# Altium PCB stm32f103_m95.PcbDoc (part 1 of 2)
Units mm, origin at the board's own origin, x right, y up, seen from the top; angles counter-clockwise.
Board outline 80 x 106 mm, 2 copper layers (Top Layer, Bottom Layer); 128 components, 90 nets, 432 pads, 87 vias.
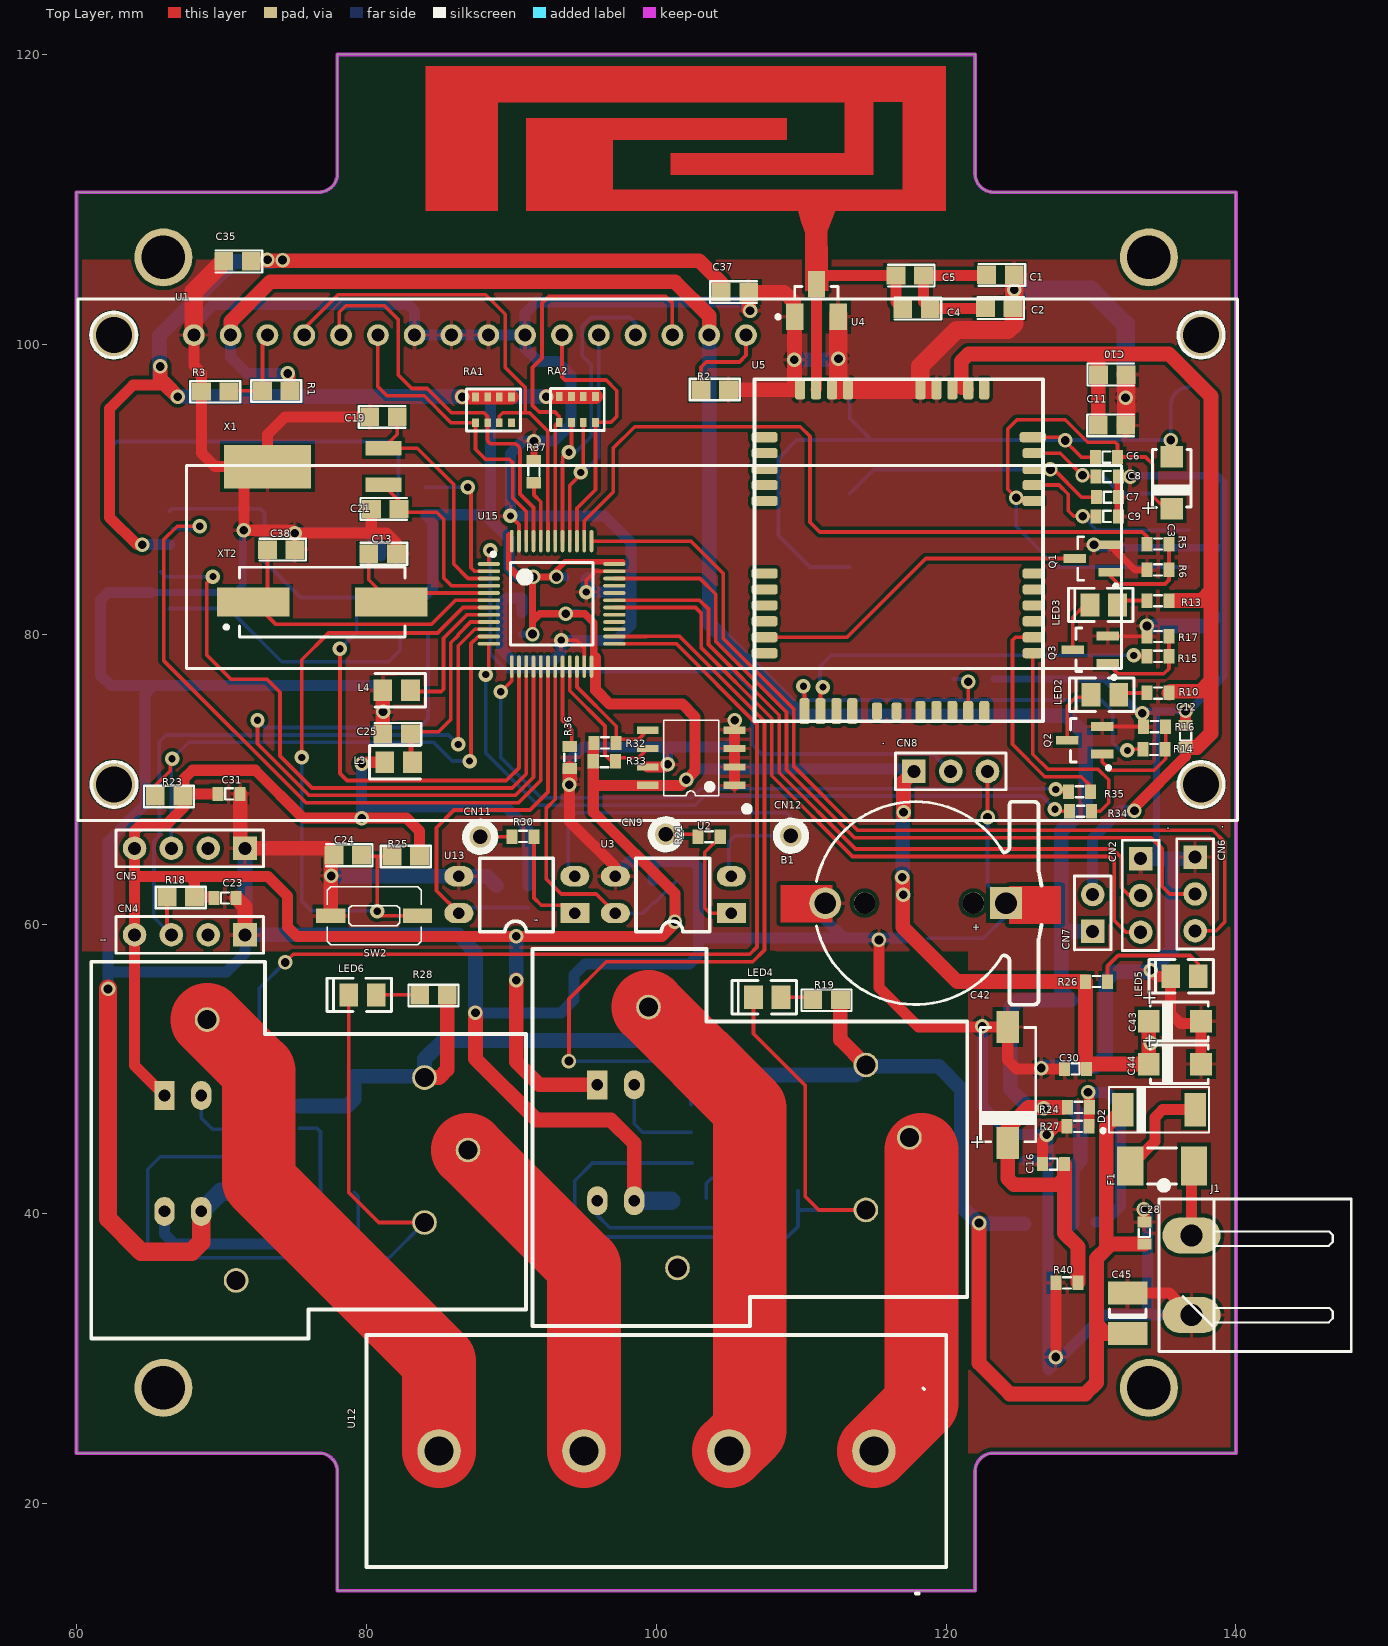
[diagram p0: Top Layer view]
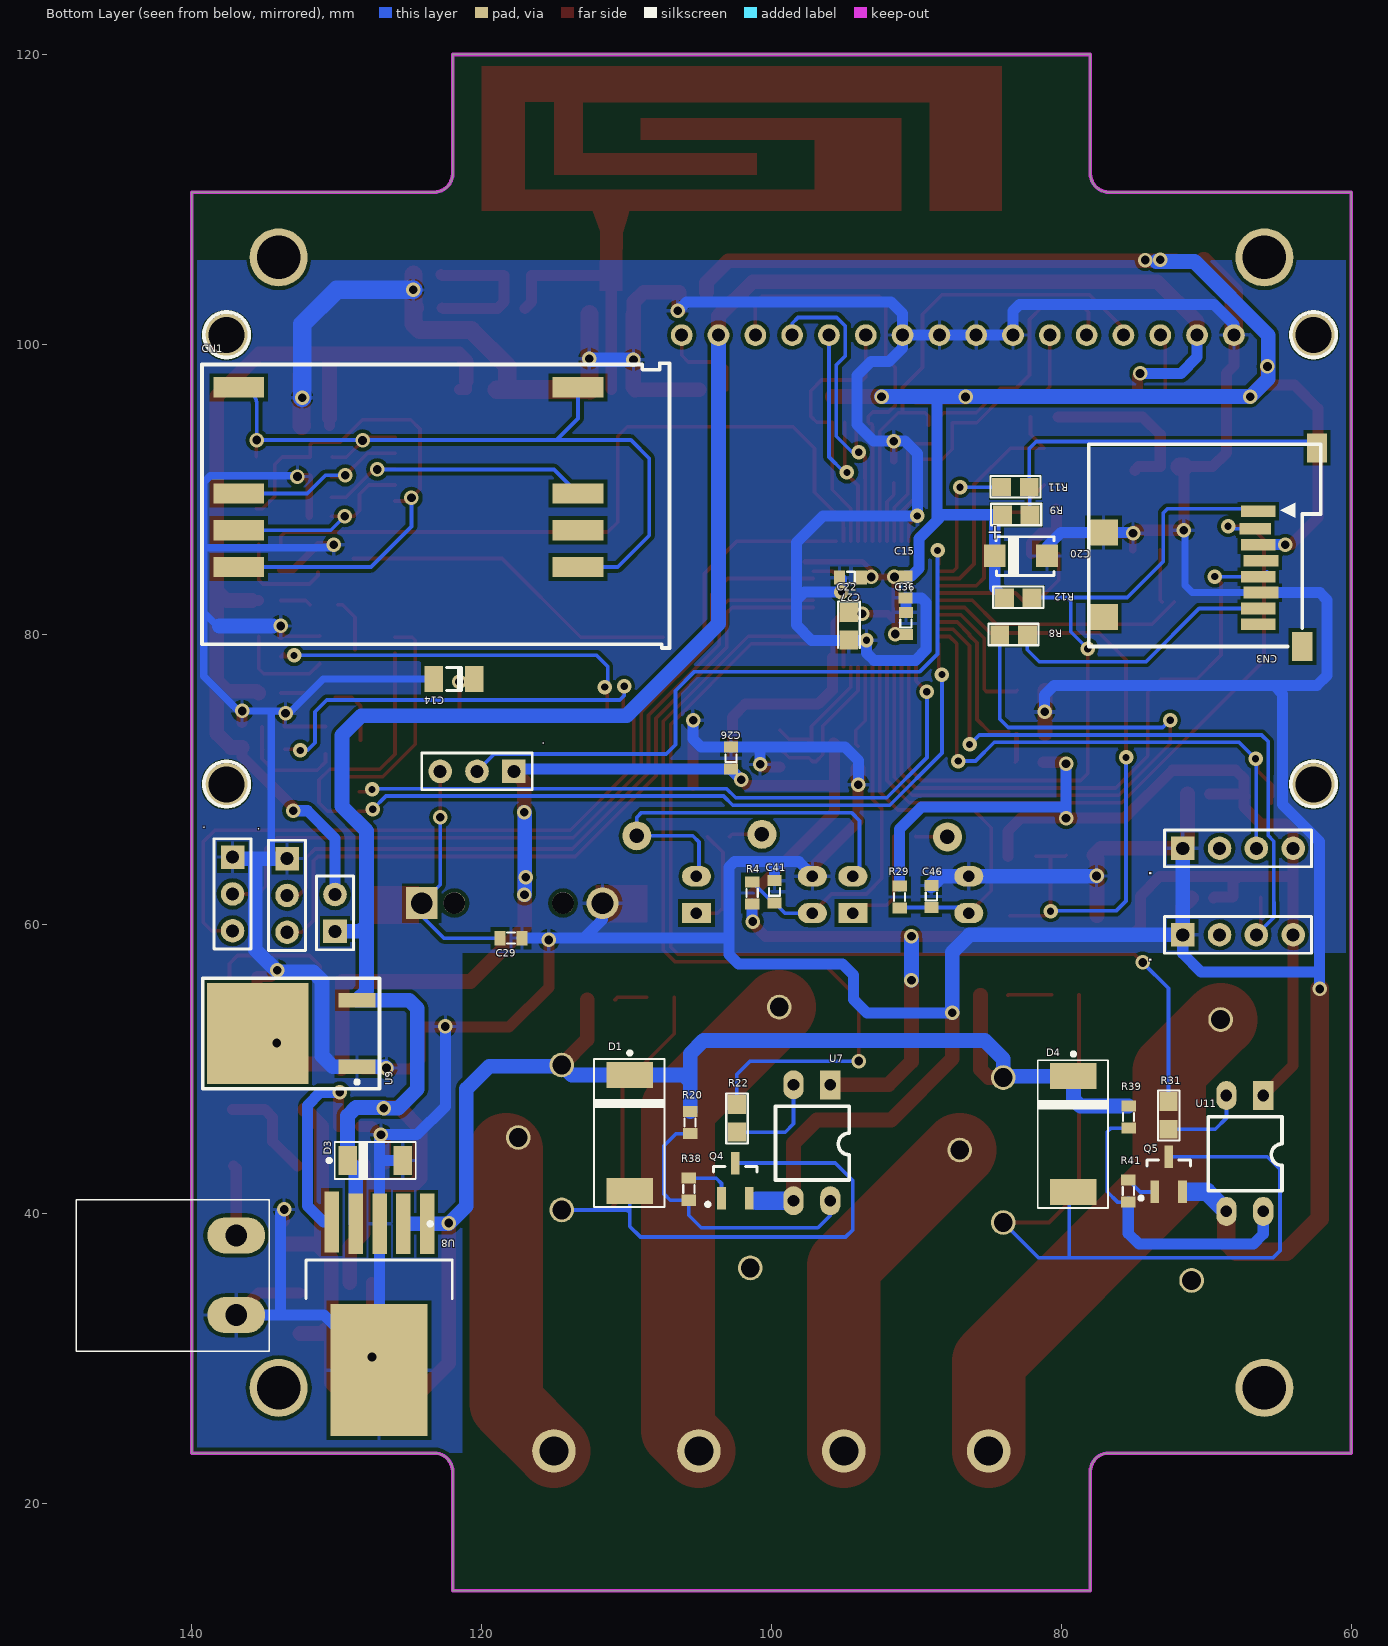
[diagram p1: Bottom Layer view, seen from below]

## Layer stack, top to bottom
Top Layer: signal copper 0.0356
Dielectric: dielectric 0.32, FR-4, Dk 4.8
Bottom Layer: signal copper 0.0356

## Board outline
60,23.5 76.73,23.5 cw(c76.73,22.23) 78,22.23 78,14 122,14 122,22.23 cw(c123.27,22.23) 123.27,23.5 140,23.5 140,110.5 123.27,110.5 cw(c123.27,111.77) 122,111.77 122,120 78,120 78,111.77 cw(c76.73,111.77) 76.73,110.5 60,110.5

## Design rules (kind name [scope] priority, off if disabled: settings)
Clearance Clearance_2 [InComponent('U15') vs InComponent('B1')] p1: gap=0.127
Clearance [All] p2: gap=0.254
Clearance Clearance_1 [IsRegion vs IsRegion] p3: gap=0.381
PolygonConnect [All] p1: connectstyle=Relief reliefconductorwidth=0.254 reliefentries=4 polygonreliefangle="90 Angle"
RoutingVias [All] p1: holewidth=0.711 width=1.27 viastyle="Through Hole" minholewidth=0.711 minwidth=1.27 maxholewidth=0.711 maxwidth=1.27
SilkscreenOverComponentPads SilkToSolderMaskClearance [IsPad] p1: minsilkscreentomaskgap=0.254
SolderMaskExpansion [All] p1: expansion=0.102
Width "Schematic Width Constraint_13" [InNet('VGSM')] p1: maxlimit=1.27 minlimit=0.762 preferedwidth=1.016
Width "Schematic Width Constraint_12" [InNet('VCC')] p2: maxlimit=1.27 minlimit=0.381 preferedwidth=1.016
Width "Schematic Width Constraint_11" [InNet('GND')] p3: maxlimit=1.27 minlimit=0.254 preferedwidth=1.016
Width "Schematic Width Constraint_10" [InNet('4V3')] p4: maxlimit=1.27 minlimit=0.762 preferedwidth=1.016
Width "Schematic Width Constraint_9" [InNet('RL_NO1')] p5: maxlimit=5.08 minlimit=2.032 preferedwidth=2.286
Width "Schematic Width Constraint_8" [InNet('RL_NO0')] p6: maxlimit=5.08 minlimit=2.032 preferedwidth=2.286
Width "Schematic Width Constraint_7" [InNet('RL_CM1')] p7: maxlimit=5.08 minlimit=2.032 preferedwidth=2.286
Width "Schematic Width Constraint_6" [InNet('RL_CM0')] p8: maxlimit=5.08 minlimit=2.032 preferedwidth=2.286
Width "Schematic Width Constraint_5" [InNet('VPP')] p9: maxlimit=1.016 minlimit=0.254 preferedwidth=0.762
Width "Schematic Width Constraint_4" [InNet('VGSM')] p10: maxlimit=1.016 minlimit=0.254 preferedwidth=0.762
Width "Schematic Width Constraint_3" [InNet('VCC')] p11: maxlimit=1.016 minlimit=0.254 preferedwidth=0.762
Width "Schematic Width Constraint_2" [InNet('NetD2_1')] p12: maxlimit=1.016 minlimit=0.254 preferedwidth=0.762
Width "Schematic Width Constraint_1" [InNet('GND')] p13: maxlimit=1.016 minlimit=0.254 preferedwidth=0.762
Width "Schematic Width Constraint" [InNet('4V3')] p14: maxlimit=1.016 minlimit=0.254 preferedwidth=0.762
Width [All] p15: maxlimit=0.762 minlimit=0.254 preferedwidth=0.254
27 further rules are at their usual default settings.

## Classes and differential pairs
component class STM32_M95: B1 C1 C2 C3 C4 C5 C6 C7 C8 C9 C10 C11 C12 C13 C14 C15 C16 C19 C20 C21 C22 C23 C24 C25 C26 C27 C28 C29 C30 C31 C35 C36 C37 C38 C41 C46 CN1 CN2 CN4 CN5 CN6 CN8 CN9 CN11 CN12 D1 D2 D3 F1 J1 L3 L4 LED2 LED3 LED4 LED5 LED6 Q1 Q2 Q3 Q4 Q5 R1 R2 R3 R4 R5 R6 R8 R9 R10 R11 R12 R13 R14 R15 R16 R17 R18 R19 R20 R21 R22 R23 R24 R25 R26 R27 R28 R29 R30 R31 R32 R33 R34 R35 R36 R37 RA1 RA2 SW2 U1 U2 U3 U4 U5 U6 U7 U8 U9 U10 U11 U12 U13 U15 X1 XT2

## Components (designator, comment, footprint, x,y, rotation, side; value= is the part's Value field where it differs from the comment)
B1 "BATT-Holder" Batt_small 117.881,61.443 r270 top
C1 "10p" C2012-0805 123.756,104.792 r180 top
C2 "33p" C2012-0805 123.679,102.506 r180 top
C3 "10uF" "Cap SMD Tant 10u" 135.56,90.449 r90 top
C4 "10p" C2012-0805 117.964,102.455 r180 top
C5 "33p" C2012-0805 117.507,104.741 r180 top
C6 "104" C1608-0603 131.071,92.219 r0 top
C7 "33pF" C1608-0603 131.147,89.45 r0 top
C8 "33pF" C1608-0603 131.122,90.873 r0 top
C9 "33pF" C1608-0603 131.122,88.129 r0 top
C10 "104" C2012-0805 131.47,97.917 r0 top
C11 "104" C2012-0805 131.445,94.412 r0 top
C12 "104" C1608-0603 136.525,72.949 r90 top
C13 "22pF" C2012-0805 81.128,85.547 r180 top
C14 "2.2uF" C1206 120.517,76.911 r0 bottom
C15 "104" C1608-0603 90.754,83.261 r270 bottom
C16 "104" C1608-0603 127.406,43.434 r180 top
C19 "10P" C2012-0805 81.178,94.996 r0 top
C20 "10uF" "Cap SMD Tant 10u" 82.797,85.403 r180 bottom
C21 "10P" C2012-0805 81.305,88.646 r0 top
C22 "104" C2012-0805 94.666,80.543 r270 bottom
C23 "104" C1608-0603 70.256,61.798 r0 top
C24 "104" C2012-0805 78.715,64.745 r180 top
C25 "104" C2012-0805 82.093,73.127 r180 top
C26 "104" C1608-0603 102.794,71.45 r90 bottom
C27 "104" C1608-0603 94.539,83.922 r0 bottom
C28 "104" C1608-0603 133.68,38.684 r90 top
C29 "104" R1608-0603 117.983,59.03 r180 bottom
C30 "104" C1608-0603 128.93,50.013 r180 top
C31 "104" C1608-0603 70.536,68.986 r0 top
C35 "104" C2012-0805 71.12,105.715 r180 top
C36 "104" C1608-0603 90.729,80.747 r90 bottom
C37 "104" C2012-0805 105.435,103.607 r0 top
C38 "22pF" C2012-0805 74.143,85.827 r180 top
C41 "104" C1608-0603 99.797,62.23 r90 bottom
C42 "10uF" "Cap SMD Tant - 470u" 124.257,48.895 r90 top
C43 "10uF" "Cap SMD Tant 10u" 135.788,53.289 r0 top
C44 "10uF" "Cap SMD Tant 10u" 135.788,50.343 r0 top
C45 "104" C1210 132.537,31.75 r90 top
C46 "104" C1608-0603 88.976,61.9 r90 bottom
CN1 "Sim Card Holder" "Sim card holder 1" 136.754,84.633 r0 bottom locked
CN2 "HDR1x3" CON.HDR1X3 133.426,64.516 r270 top
CN3 "SD Card/MMC" mini_SDCard 66.421,87.274 r270 bottom
CN4 "HDR1x4" CON.HDR1X4 71.628,59.258 r180 top
CN5 "HDR1x4" CON.HDR1X4 71.628,65.227 r180 top
CN6 "HDR1x3" CON.HDR1X3 137.185,64.618 r270 top
CN7 "HDR1x2" CON.HDR1X2 130.124,59.512 r90 top
CN8 "HDR1x3" CON.HDR1X3 117.78,70.536 r0 top
CN9 "HDR1" CON.HDR1 100.66,66.192 r90 top
CN11 "HDR1" CON.HDR1 87.859,66.015 r90 top
CN12 "HDR1" CON.HDR1 109.296,66.091 r90 top
D1 "FR307" DO-214AB,SMC 109.779,41.58 r90 bottom
D2 "1N4007" DO-214AA,SMB 137.185,47.193 r180 top
D3 "Zener" D1208 125.44,43.688 r0 bottom
D4 "FR307" DO-214AB,SMC 79.172,41.504 r90 bottom
F1 "FUSE" FUSE.SMD2010 137.109,43.307 r180 top
J1 "Domino2" "Domino 2 - Thao roi" 136.931,33.02 r0 top
L3 "100uH" L2012-0805 82.22,71.171 r0 top
L4 "100uH" L2012-0805 82.093,76.124 r180 top
LED2 "LED" LED.SMD0805 130.962,75.819 r0 top
LED3 "LED" LED.SMD0805 130.886,82.017 r0 top
LED4 "LED" LED.SMD0805 107.671,54.94 r0 top
LED5 "LED" LED.SMD0805 136.449,56.388 r0 top
LED6 "LED" LED.SMD0805 79.737,55.109 r0 top
Q1 "C1815" "SOT23 [C1815]" 129.787,85.226 r180 top
Q2 "C1815" "SOT23 [C1815]" 129.279,72.678 r180 top
Q3 "C1815" "SOT23 [C1815]" 129.66,78.926 r180 top
Q4 "C1815" "SOT23 [C1815]" 102.496,42.587 r90 bottom
Q5 "C1815" "SOT23 [C1815]" 72.6,43.019 r90 bottom
R1 "Value" R2012-0805 73.794,96.791 r180 top
R2 "Value" R2012-0805 104.038,96.876 r0 top
R3 "Value" R2012-0805 69.577,96.74 r180 top
R4 "10k" R1608-0603 101.346,62.154 r270 bottom
R5 "1k" R1608-0603 134.62,86.208 r0 top
R6 "1k" R1608-0603 134.62,84.43 r0 top
R8 "0" R2012-0805 83.305,79.968 r180 bottom
R9 "10k" R2012-0805 83.127,88.248 r180 bottom
R10 "1k" R1608-0603 134.62,75.946 r180 top
R11 "1k" R2012-0805 83.178,90.153 r180 bottom
R12 "100k" R2012-0805 82.975,82.533 r180 bottom
R13 "1k" R1608-0603 134.62,82.321 r180 top
R14 "1k" R1608-0603 134.341,72.06 r180 top
R15 "1k" R1608-0603 134.62,78.461 r0 top
R16 "1k" R1608-0603 134.391,73.609 r0 top
R17 "1k" R1608-0603 134.62,79.858 r180 top
R18 "1k" R2012-0805 67.208,61.849 r180 top
R19 "1k" R2012-0805 111.76,54.762 r180 top
R20 "10k" R1608-0603 105.613,46.304 r90 bottom
R21 "220" R1608-0603 103.657,66.015 r0 top
R22 "220" R2012-0805 102.394,46.6 r270 bottom
R23 "1k" R2012-0805 66.396,68.809 r180 top
R24 "120k" R1608-0603 129.134,47.346 r0 top
R25 "1k" R2012-0805 82.728,64.668 r180 top
R26 "1k" R1608-0603 130.378,56.032 r0 top
R27 "51K" R1608-0603 129.108,46.05 r180 top
R28 "1k" R2012-0805 84.64,55.084 r180 top
R29 "10k" R1608-0603 91.161,61.874 r90 bottom
R30 "220" R1608-0603 90.805,66.04 r0 top
R31 "220" R2012-0805 72.6,46.804 r270 bottom
R32 "Value" R1608-0603 96.469,72.492 r0 top
R33 "Value" R1608-0603 96.418,71.222 r180 top
R34 "22" R1608-0603 129.286,67.793 r180 top
R35 "22" R1608-0603 129.21,69.139 r180 top
R36 "10k" R1608-0603 94.031,71.501 r270 top
R37 "10k" R1608-0603 91.567,91.211 r90 top
R38 "10k" R1608-0603 105.715,41.707 r270 bottom
R39 "10k" R1608-0603 75.362,46.685 r90 bottom
R40 "1k" R1608-0603 128.346,35.255 r180 top
R41 "10k" R1608-0603 75.387,41.58 r270 bottom
RA1 "10,100,1K,10K" Res_Array_Chip 89.967,96.368 r180 top
RA2 "10,100,1K,10K" Res_Array_Chip 95.758,96.393 r180 top
SW2 "PTS635" TactSwitches.PTS635.SMT 80.543,60.579 r180 top
U1 "LCD.LCD16x2" LCD16x2 68.097,100.635 r0 top locked
U2 "24C04" SOIC8 105.41,69.571 r180 top
U3 "PC817" DIP4 105.181,60.757 r180 top
U4 "ANTEN" SOT150P320X110-3N 111.057,103.022 r90 top
U5 "M95" QFN50P400X400X80_HS-15N 106.782,73.99 r0 top locked
U6 "RELAY_OMRON_4PIN" PCBComponent_1#1 121.47,32.275 r90 top locked
U7 "PC817" DIP4 95.943,48.912 r270 bottom
U8 "MIC29302" DPAK165P1524X238-5N 121.742,41.656 r0 bottom
U9 "LM1117-3.3V" TO-252 128.448,52.451 r90 bottom
U10 "RELAY_OMRON_4PIN" PCBComponent_1#1 91.015,31.411 r90 top locked
U11 "PC817" DIP4 66.072,48.175 r270 bottom
U12 "Component_1" PCBComponent_1#2 120.015,15.646 r90 top
U13 "PC817" DIP4 94.386,60.757 r180 top
U15 "STM32F103C8T6" QFP48_pitch_0.5mm 92.786,82.093 r0 top locked
X1 "32.768Khz" "Crystal cylinder" 81.178,92.837 r0 top
XT2 "8MHz" QC49/SMD 76.962,82.22 r0 top

## Footprints (in the part's own frame and the unit in brackets; to place one, negate y for a bottom-side part, rotate by r counter-clockwise, add the part's x,y. Pads: shape width x height; smd on the part's side, far side on the other; paste and mask are expansions set on the pad)
Batt_small [mm] "BR-1632/HFN - Panasonic"
  round 1.5 hole 1.5 paste+0.127 mask+0.127: 0(0,4) 0(0,-3.5)
  rect 2.2x2.2 hole 1.5: 1(0,6.25)
  round 2.2 hole 1.5: 2(0,-6.223)
  Top Layer region: 1.422,6.452 1.422,10.052 -1.178,10.052 -1.178,6.452
  Top Layer region: 1.33,-9.322 1.33,-5.722 -1.27,-5.722 -1.27,-9.322
  silkscreen extent -7,-6.84 7,8.7, body extent -8.03,-8.04 7.91,7.93, height 3.6
C1206 [mm] "Chip Capacitor; Body 3.2 x 1.6 mm (LxW typ)"
  rect 1.27x1.8 smd: 1(0,0) 2(2.8,0)
  silkscreen extent 0.87,-0.81 1.9,0.8
C1210 [mm] "Chip Capacitor; Body 3.2 x 2.5 mm (LxW typ)"
  rect 1.6x2.7 smd: 1(0,0) 2(2.8,0)
  silkscreen extent 1.1,-1.25 1.7,1.25
C1608-0603 [mil] "Capacitor Chip 0603 package"
  rect 30x38 smd: 1(-30,0.05) 2(30,0.05)
  silkscreen extent -11,-15 10,15, body extent -28,-17 28,17, height 32
C2012-0805 [mm] "Capacitor Chip 0805 package"
  rect 1.3x1.27 smd: 1(-0.945,-0.007) 2(0.955,-0.007)
  silkscreen extent -1.7,-0.76 1.51,0.75, body extent -0.89,-0.58 0.89,0.58, height 0.79
"Cap SMD Tant 10u" [mm] "CAP TANT 10UF 16V 10% 1210"
  rect 1.5x1.55 smd: 1(-1.8,0) 2(1.8,0)
  silkscreen extent -1.7,-1.4 2.3,1.37, body extent -2.4,-0.91 2.4,0.89, height 1.8
"Cap SMD Tant - 470u" [mm] "CAP TANT 10UF 50V 10% 2917"
  rect 2.2x1.55 smd: 1(-4,0) 2(4,0)
  silkscreen extent -3.91,-1.93 3.96,1.91, body extent -3.76,-1.78 3.84,1.73, height 2.79
CON.HDR1 [mm]
  round 2 hole 1: 1(0,0)
  silkscreen extent -1,-1 1,1
CON.HDR1X2 [mil]
  rect 64x64 hole 35.43: 1(-0.44,0.28)
  round 64 hole 35.43: 2(99.56,0.28)
  silkscreen extent -51,-50 150,50, body extent -51,-50 149,50, height 350
CON.HDR1X3 [mil]
  rect 64x64 hole 35.43: 1(0,0)
  round 64 hole 35.43: 2(100,0) 3(200,0)
  silkscreen extent -50,-50 250,50, body extent -50,-50 250,50, height 350
CON.HDR1X4 [mil]
  rect 64x64 hole 35.43: 1(0,0)
  round 64 hole 35.43: 2(100,0) 3(200,0) 4(300,0)
  silkscreen extent -50,-50 350,50, body extent -50,-50 350,50, height 350
"Crystal cylinder" [mm] "Crystal footsprint type 1"
  rect 2.5x1 smd: 1(0,0) 2(0,-2.54)
  rect 6x3 smd: 3(-8,-1.27)
  body extent -9.33,-2.75 -0.36,0.3, height 2
D1208 [mil]
  rect 50x80 smd: 1(0,0) 2(150,0)
  silkscreen extent -35,-50 205,50
DIP4 [mm]
  rect 2x1.4 hole 0.8: 1(0,0)
  oval 2x1.4 hole 0.8: 2(0,-2.54) 3(8,-2.54) 4(8,0)
  silkscreen extent 1.48,-3.78 6.57,1.3, body extent -0.17,-3.72 8.19,1.34, height 5.4
DO-214AA,SMB [mm]
  rect 1.5x2.3 smd: 1(0,0) 2(5,0)
  silkscreen extent -0.95,-1.6 6.48,1.57, body extent -0.19,-1.78 5.21,1.82, height 2.3
DO-214AB,SMC [mm]
  rect 1.8x3.2 smd: 1(0,0) 2(8,0)
  silkscreen extent -1.1,-2.39 9.65,2.46, body extent 0.04,-2.97 7.99,2.93, height 2.3
"Domino 2 - Thao roi" [mm]
  oval 4x2.5 hole 1.5: 1(0,5.5) 2(0,0)
  silkscreen extent -2.25,-2.5 11.03,9.2, body extent -1.09,-2.54 11.07,8, height 9
DPAK165P1524X238-5N [mm] "D2-PAK, 5-Pads, Body 8.43x8.39mm (max), IPC Medium Density"
  rect 1x4.2 smd: 1(2,2.336) 2(3.65,2.336) 3(5.3,2.336) 4(6.95,2.336) 5(8.6,2.209)
  rect 6.7x9.1 smd: 3(5.334,12.436)
  silkscreen extent 0.28,2.21 10.38,7.49, body extent 0.31,4.24 10.36,14.91, height 2.38
FUSE.SMD2010 [mm] "2010 Body 5.0 x 2.5 mm (LxW typ)"
  rect 1.8x2.7 smd: 1(0,0) 2(4.4,0)
  silkscreen extent 1.2,-1.25 3.2,1.25
L2012-0805 [mm] "Inductor Chip 0805 package"
  rect 1.3x1.5 smd: 1(-0.945,-0.007) 2(0.955,-0.007)
  silkscreen extent -1.99,-1.16 1.51,1.14, body extent -0.89,-0.58 0.89,0.58, height 0.79
LCD16x2 [mm] "Character LCD 16x2"
  round 1.5 hole 0.9: 1(0,0) 2(2.54,0) 3(5.08,0) 4(7.62,0) 5(10.16,0) 6(12.7,0) 7(15.24,0) 8(17.78,0) 9(20.32,0) 10(22.86,0) 11(25.4,0) 12(27.94,0) 13(30.48,0) 14(33.02,0) 15(35.56,0) 16(38.1,0)
  round 3 hole 2.5 unplated: M1(-5.5,0) M2(69.5,0) M3(-5.5,-31) M4(69.5,-31)
  silkscreen extent -8,-33.5 72,2.5, body extent -8.01,-33.5 72,2.5, height 14.16
LED.SMD0805 [mm]
  rect 1.3x1.6 smd: 1(0.948,0.006) 2(-0.952,0.006)
  silkscreen extent -2.44,-1.14 2,1.16, body extent -1.08,-0.64 1.08,0.64, height 1.14
mini_SDCard [mm]
  rect 0.8x2.4 smd paste+0.127 mask+0.127: 1(-1.21,0) 3(1.1,0) 4(2.2,0.2) 5(3.3,0) 6(4.4,0.2) 7(5.5,0) 8(6.6,0)
  rect 0.8x2.2 smd paste+0.127 mask+0.127: 2(0,-0.2)
  rect 2x1.4 smd paste+0.127 mask+0.127: 9(8.128,3.048) 10(-5.588,4.064)
  rect 1.8x2 smd paste+0.127 mask+0.127: 11(0.254,-10.668) 12(6.096,-10.668)
  silkscreen extent -5.84,-11.68 8.13,4.32, body extent -5.84,-11.63 8.01,4.52, height 1.68
PCBComponent_1#1 [mm]
  round 1.7 hole 1.3: 1(4,20) 2(18,7) 3(8,7) 4(22,22) 5(13,4)
  silkscreen extent 0,0 26,30
PCBComponent_1#2 [mm]
  round 3 hole 2: 1(8,5) 2(8,15) 3(8,25) 4(8,35)
  silkscreen extent 0,0 16,40
QC49/SMD [mm] "Surface Mount 20MHz Crystal, 12.9mm x 4.8mm (LxW)"
  rect 5x2 smd: 1(-4.75,0) 2(4.75,0)
  silkscreen extent -6.75,-2.4 5.7,2.4
QFN50P400X400X80_HS-15N [mm] "QFN, 14-Leads, Body 4.00x4.00mm, Pitch 0.50mm, Thermal Pad 4.00x2.20mm, IPC Medium Density"
  rrect50% 1.8x0.7 smd: 1(0.7,19.6) 2(0.7,18.5) 3(0.7,17.4) 4(0.7,16.3) 5(0.7,15.2) 6(0.7,10.2) 7(0.7,9.1) 8(0.7,8) 9(0.7,6.9) 10(0.7,5.8) 11(0.7,4.7) 31(19.2,19.6)
  rrect50% 0.7x1.8 smd: 12(3.45,0.7) 13(4.55,0.7) 14(5.65,0.7) 15(6.75,0.7)
  rrect50% 0.7x1.4 smd: 16(11.45,0.7) 17(12.55,0.7) 18(13.65,0.7) 19(14.75,0.7) 20(15.85,0.7) 32(15.85,22.9) 33(14.75,22.9) 34(13.65,22.9) 35(12.55,22.9) 36(11.45,22.9) 37(6.45,22.9) 38(5.35,22.9) 39(4.25,22.9) 40(3.15,22.9)
  rrect50% 1.4x0.7 smd: 21(19.2,4.7) 22(19.2,5.8) 24(19.2,8) 25(19.2,9.1) 26(19.2,10.2) 27(19.2,15.2) 28(19.2,16.3) 29(19.2,17.4) 30(19.2,18.5) 223(19.2,6.9)
  rrect50% 0.7x1.2 smd: 41(8.45,0.7) 42(9.8,0.7)
  silkscreen extent 0,0 19.9,23.6
QFP48_pitch_0.5mm [mm] "48-Pin Thin Quad Flat Pack 0.5 mm Pitch, IPC High Density"
  oval 1.55x0.25 smd: 1(-4.33,2.75) 2(-4.33,2.25) 3(-4.33,1.75) 4(-4.33,1.25) 5(-4.33,0.75) 6(-4.33,0.25) 7(-4.33,-0.25) 8(-4.33,-0.75) 9(-4.33,-1.25) 10(-4.33,-1.75) 11(-4.33,-2.25) 12(-4.33,-2.75) 25(4.33,-2.75) 26(4.33,-2.25) 27(4.33,-1.75) 28(4.33,-1.25) 29(4.33,-0.75) 30(4.33,-0.25) 31(4.33,0.25) 32(4.33,0.75) 33(4.33,1.25) 34(4.33,1.75) 35(4.33,2.25) 36(4.33,2.75)
  oval 0.25x1.55 smd: 13(-2.75,-4.33) 14(-2.25,-4.33) 15(-1.75,-4.33) 16(-1.25,-4.33) 17(-0.75,-4.33) 18(-0.25,-4.33) 19(0.25,-4.33) 20(0.75,-4.33) 21(1.25,-4.33) 22(1.75,-4.33) 23(2.25,-4.33) 24(2.75,-4.33) 37(2.75,4.33) 38(2.25,4.33) 39(1.75,4.33) 40(1.25,4.33) 41(0.75,4.33) 42(0.25,4.33) 43(-0.25,4.33) 44(-0.75,4.33) 45(-1.25,4.33) 46(-1.75,4.33) 47(-2.25,4.33) 48(-2.75,4.33)
  silkscreen extent -4.15,-2.85 2.85,3.55, body extent -4.52,-4.52 4.5,4.5, height 1.1
R1608-0603 [mil] "Resister Chip 0603 package"
  rect 30x39.37 smd: 1(-30,0.05) 2(30,0.05)
  silkscreen extent -11,-15 10,16, body extent -28,-17 28,17, height 12
R2012-0805 [mm] "Resister Chip 0805 package"
  rect 1.3x1.27 smd: 1(-0.945,-0.007) 2(0.955,-0.007)
  silkscreen extent -1.72,-0.73 1.73,0.75, body extent -0.89,-0.58 0.89,0.58, height 0.41
Res_Array_Chip [mil] "Res Array Chip 4xRes"
  rect 18x24 smd: 1(-2,0) 2(31.5,0) 3(62.99,0) 4(96,0) 5(96,70) 6(62.99,70) 7(31.5,70) 8(-2,70)
  silkscreen extent -26,-22 120,92, body extent -16,3 110,65, height 20
"Sim card holder 1" [mm]
  rect 3.5x1.4 smd: 1(0,0) 2(0,-2.54) 3(0,-5.08) 4(0,-12.4) 5(-23.4,0) 6(-23.4,-2.54) 7(-23.4,-5.08) 8(-23.4,-12.4)
  silkscreen extent -29.72,-14.07 2.54,5.59, body extent -28.21,-12.45 1.79,4.85, height 2.5
SOIC8 [mm]
  rect 1.5x0.5 smd: 1(0,0) 2(0,-1.27) 3(0,-2.54) 4(0,-3.81) 5(6,-3.81) 6(6,-2.54) 7(6,-1.27) 8(6,0)
  silkscreen extent -1.05,-4.5 4.9,1.82, body extent -0.08,-4.39 5.92,0.51, height 1.7
"SOT23 [C1815]" [mm] "SOT23, 3-Leads, Body 3.0x2.6mm (max), Pitch 0.95mm, IPC Medium Density"
  rect 1.55x0.6 smd: 1(-1.5,0.95) 2(-1.5,-0.95) 3(0.925,0)
  silkscreen extent -2.05,-1.5 0.7,2.02, body extent -1.53,-1.5 1.53,1.5, height 1.1
SOT150P320X110-3N [mm] "SOT23, 3-Leads, Body 3.00x3.20mm, Pitch 1.50mm, IPC Medium Density"
  rect 1.85x1.2 smd: 1(1.125,0) 2(-1.125,1.5) 3(-1.125,-1.5)
  silkscreen extent -1.25,-1.5 0.96,2.77, body extent -0.95,-1.5 0.96,1.5, height 1.1
TactSwitches.PTS635.SMT [mil] "3,5 mm Tact Switches, PTS635 Series"
  rect 79x39 smd: 1(-118,0) 2(118,0)
  silkscreen extent -128,-79 128,79, body extent -135,-70 135,70, height 100
TO-252 [mm]
  rect 1x2.54 smd: 1(-2.3,0.152) 3(2.3,0.152)
  rect 7x7 smd: 2(0,7)
  silkscreen extent -3.81,-1.4 3.81,10.79, body extent -3.24,-0.27 3.3,9.67, height 2.44

## Part data
B1: "Battery holder"
C1 C2 C4 C5 C6 C7 C8 C9 C10 C11 C12 C13 C14 C15 C16 C19 C21 C22 C23 C24 C25 C26 C27 C28 C29 C30 C31 C35 C36 C37 C38 C41 C45 C46: library part Capacitor, "Cap, Ceramic Capacitor, 104, 10V"
C3 C20 C42 C43 C44: library part Cap_Pol, "Cap, Polizared Capacitor 10uF,16V"
CN2 CN6 CN8: "Conn, Header 1x3"
CN3: "MMC/SD Card"
CN4 CN5: "Conn, Header 1x4"
CN7: "Conn, Header 1x2"
CN9 CN11 CN12: "Conn, Header 1"
D1 D4: library part "Diode FR307", "Diode, Fast Recovery, 3A FR307"
D2: library part "Diode 1N4007", "Diode, General Purpose Rectifier, 1Amp,1000V 1N4007"
D3: library part "Diode Zener", "Diode, Zener"
J1: "Conn, 2 pins Domino Header"
L3 L4: library part Inductor, "Ind, 100uH, 20%"
LED2 LED3 LED4 LED5 LED6: "Led, Red, SMD0805"
Q1 Q2 Q3 Q4 Q5: "BJT, Audio Freq Amplifier NPN Transistor C1815"
R1 R2 R3 R4 R5 R6 R8 R9 R10 R11 R13 R14 R15 R16 R17 R18 R19 R20 R21 R22 R23 R24 R25 R26 R27 R28 R29 R30 R31 R32 R33 R34 R35 R36 R37 R38 R39 R40 R41: library part Resistor, "Res, 1K,1/10W, 0805, 10%"
R12: library part Resistor, "Resistor"
RA1 RA2: library part "Resister Array Chip 4xR", "Res Array Chip,10%"
SW2: library part "SW TACT MOM SPST", "SWITCH, TACT MOM SPST SMD"
U1: "LCD, 2 line 16 charactors"
U2: library part 24LC04, "IC, 2-wire Serial EEPROM 512K 24C04"
U3 U7 U11 U13: "Opto, High Density Opto-Coupler PC817"
U4 U5 U6 U8 U10: library part Component_1
U9: library part LM1117MP-3.3TR, "IC, 3.3V 800mA Low-Dropout Linear Regulator LM1117-3.3V"
U15: "STM32 ARM-based 32-bit MCU with 64 Kbytes Flash, 48-pin LQFP, Industrial Temperature"
X1: library part "Xtal 1", "Osc, 32.768Khz, Tuning Forl Crystal Units (SMD-Cylinder Type)"
XT2: library part "Xtal 2", "Osc, 4Mhz Crystal"

## Free pads (board coordinates)
  round 4 hole 3: 0(66,106) 1(134,106) 2(66,28) 3(134,28)

## Via types
v1: diameter 1, hole 0.6, Top Layer to Bottom Layer, tented both sides, 63 vias
v2: diameter 1, hole 0.5, Top Layer to Bottom Layer, tented both sides, 24 vias

## Nets (pads, with @x,y where several pads share a name; then routed paths per layer and width w, separated by ;. In a path a pad name is that pad's centre, name@x,y a point inside that pad or via, vN(x,y) a via of type N, cw(c..) or ccw(c..) an arc to the next point about the centre after c; other vN are vias at no path point)
4V3: C16.1 C42.1 CN7.1 D3.2 R1.1 R24.1 R40.1 U1.2 U1.15 U8.4 U9.3 | length 159.3
  Top Layer w0.762: v1(74.574,97.993) 74.738,97.829 R1.1@74.738,96.798
  Top Layer w1.016: U1.2@70.637,100.635 70.637,101.575 73.381,104.318 101.295,104.318 103.657,101.956 U1.15@103.657,100.635 ; R24.1@128.118,47.347 125.681,47.347 124.257,45.923 C42.1@124.257,44.895 124.257,42.443 124.689,42.012 127.711,42.012 128.168,42.469 ; C16.1@128.168,43.433 128.168,42.469 ; R40.1@129.108,35.254 129.108,37.744 128.168,38.684 128.168,42.469
  Bottom Layer w0.762: U1.2@70.637,100.635 70.637,99.111 71.755,97.993 v1(74.574,97.993)
  Bottom Layer w1.016: U1.15@103.657,100.635 103.657,80.721 110.007,74.371 128.295,74.371 129.642,73.025 129.642,68.123 127.94,66.421 127.94,59.919 ; U8.4@128.692,39.32 128.692,43.13 D3.2@129.25,43.688 129.25,46.772 128.676,47.346 126.797,47.346 v1(126.746,47.295) 125.755,47.295 124.435,48.616 124.435,54.178 125.007,54.751 U9.3@128.6,54.751 127.94,55.411 127.94,59.919 ; CN7.1@130.117,59.501 128.357,59.501 127.94,59.919
BOOT0: R37.1 U15.44 | length 4.2
  Top Layer w0.254: R37.1@91.566,90.449 91.566,89.613 92.036,89.142 U15.44@92.036,86.423
BOOT1: R36.1 U15.20 | length 5.8
  Top Layer w0.254: U15.20@93.536,77.763 93.536,74.028 94.183,73.381 94.183,72.414 R36.1@94.032,72.263
DATA1: CN4.3 R18.2 U15.10 | length 47.2
  Top Layer w0.254: R18.2@66.253,61.856 66.253,59.553 CN4.3@66.548,59.258 ; v2(86.335,72.39) 86.335,79.197 87.48,80.343 U15.10@88.456,80.343
  Bottom Layer w0.254: CN4.3@66.548,59.258 65.329,60.477 65.329,61.493 65.354,61.519 65.354,65.722 65.735,66.103 65.735,70.307 65.718,70.325 65.718,72.576 66.192,73.05 85.674,73.05 v2(86.335,72.39)
DATA2: CN5.3 R23.2 U15.11 | length 42.1
  Top Layer w0.254: R23.2@65.44,68.816 65.44,69.555 66.472,70.587 66.472,71.272 v2(66.599,71.399) ; R23.2@65.516,68.333 65.516,69.555 ; v2(87.122,71.247) 87.224,71.349 87.224,79.35 87.717,79.843 U15.11@88.456,79.843
  Bottom Layer w0.254: CN5.3@66.167,65.608 CN5.3@66.548,65.227 66.548,71.349 v2(66.599,71.399) 67.742,72.542 84.633,72.542 85.928,71.247 v2(87.122,71.247)
GND: B1.2 C1.1 C2.1 C7.2 C8.2 C9.2 C10.2 C11.2 C12.2 C13.1 C14.2 C15.2 C16.2 C19.1 C20.2 C21.1 C22.2 C23.2 C24.2 C25.2 C26.2 C27.2 C28.2 C29.2 C30.2 C31.2 C35.2 C36.2 C37.2 C38.1 C41.2 C42.2 C43.2 C44.2 C45.2 C46.2 CN2.1 CN3.6 CN3.11 CN4.1 CN5.1 CN6.1 D3.1 J1.2 L4.2 LED5.2 Q1.2 Q2.2 Q3.2 Q4.2 Q5.2 R2.2 R3.2 R6.1 R16.1 R17.2 R27.2 R36.2 R37.2 R40.2 SW2.2 U1.1 U1.7 U1.8 U1.9 U1.10 U2.1 U2.2 U2.3 U2.4 U2.7 U3.3 U4.2 U4.3 U5.35 U5.36 U5.37 U5.38 U5.40 U7.3 U8.3 U9.1 U11.3 U13.3 U15.23 U15.35 U15.47 X1.3 | length 691.1
  Top Layer w0.254: v2(89.941,88.163) 90.536,87.569 U15.47@90.536,86.423 ; v2(93.447,79.578) 94.513,79.578 95.036,79.055 U15.23@95.036,77.763 ; v2(95.174,82.906) 95.174,83.718 95.798,84.343 U15.35@97.116,84.343 ; Q2.2@130.779,73.628 130.787,73.636 R16.1@133.629,73.636 ; Q3.2@131.16,79.876 131.18,79.856 R17.2@133.858,79.856 ; R16.1@133.629,73.611 R16.1@133.629,73.636 ; v1@133.629,74.752 R16.1@133.629,73.636
  Top Layer w0.508: v1@74.752,87.173 75.087,86.838 C38.1@75.087,85.834 ; R37.2@91.566,91.973 v1(91.566,93.318) ; v1(130.2,86.176) Q1.2@131.287,86.176 133.032,84.431 R6.1@133.858,84.431 ; C9.2@131.884,88.131 C8.2@131.884,90.874 v1(132.708,90.874) ; R17.2@133.858,79.856 v1(133.858,80.569)
  Top Layer w0.762: U1.1@68.097,100.635 68.097,98.552 68.622,98.027 R3.2@68.622,96.747 68.622,92.516 69.571,91.567 X1.3@71.526,91.567 ; X1.3@71.831,91.567 71.552,91.288 v1(71.552,87.173) 74.752,87.173 74.854,87.173 v1(75.057,86.97) 80.34,86.97 ; X1.3@74.93,91.313 74.676,91.567 X1.3@73.178,91.567 73.178,93.778 74.39,94.989 C19.1@80.234,94.989 ; C21.1@80.361,88.639 80.34,88.618 80.34,86.97 ; C13.1@82.072,85.554 82.072,86.285 81.388,86.97 80.34,86.97 ; v1@94.032,70.026 94.032,67.08 97.181,63.931 U3.3@97.181,63.297 ; U2.7@99.41,70.841 v1@100.609,70.841 ; U2.1@105.41,69.571 U2.2@105.41,70.841 U2.3@105.41,72.111 U2.4@105.41,73.381 v1(105.41,74.068) ; v1(115.367,58.903) 115.367,55.626 118.098,52.895 C42.2@124.257,52.895 124.257,50.621 124.866,50.011 C30.2@128.168,50.011 ; C16.2@126.619,43.458 C16.2@126.644,43.433 126.644,45.11 127.583,46.049 R27.2@128.346,46.049 ; v1(127.559,30.124) 127.584,30.15 R40.2@127.584,35.254 ; C11.2@132.4,94.405 C11.2@132.426,94.43 ; C45.2@132.537,34.55 135.401,34.55 J1.2@136.931,33.02 ; C28.2@133.612,39.513 C28.2@133.679,39.446 133.679,40.26 v1(133.629,40.31) ; v1(134.112,56.813) 134.531,56.394 LED5.2@135.496,56.394 135.496,53.81 136.169,53.137 136.728,53.137 ; C12.2@136.532,73.904 v1@136.532,74.498 ; C44.2@137.588,50.343 C43.2@137.588,53.289
  Top Layer w1.016: C23.2@71.018,61.8 71.628,61.19 CN4.1@71.628,59.258 ; C31.2@71.298,68.988 71.298,65.557 CN5.1@71.628,65.227 77.284,65.227 C24.2@77.759,64.752 77.546,64.539 SW2.2@77.546,60.579 ; C25.2@81.137,73.134 L4.2@81.137,76.131 ; v1(87.528,53.873) 87.528,50.698 91.745,46.482 96.876,46.482 98.483,44.875 U7.3@98.483,40.912 ; R36.2@94.032,70.739 94.032,70.026 v1@94.056,70.002 ; R2.2@104.994,96.869 109.391,96.869 109.412,96.847 109.412,96.89 109.525,97.003 ; v1(106.477,102.311) 106.391,102.397 C37.2@106.391,103.6 108.821,103.6 109.499,102.921 109.499,102.13 109.557,102.073 109.525,102.041 v1(109.525,98.933) 109.525,97.003 ; U4.2@109.557,101.897 109.557,97.035 109.525,97.003 ; U5.37@113.232,96.86 U5.37@113.232,96.89
  Top Layer w1.27: v1(62.179,55.524) 62.179,39.675 64.465,37.389 67.945,37.389 68.612,38.056 U11.3@68.612,40.175 ; U1.1@68.097,100.635 68.097,103.655 C35.2@70.165,105.722 ; X1.3@71.526,91.567 X1.3@71.831,91.567 ; 112.522,96.825 112.557,96.86 ; U4.3@112.557,102.073 U4.3@112.557,101.897 112.557,96.86 ; U5.37@113.232,96.89 U5.36@118.232,96.89 118.232,98.496 120.725,100.989 124.267,100.989 124.7,101.422 C2.1@124.7,102.589 ; 118.948,96.86 113.232,96.86 112.557,96.86 ; C2.1@124.624,102.513 C2.1@124.7,102.589 ; C1.1@124.7,104.799 C2.1@124.7,102.589 ; C11.2@132.4,94.389 C11.2@132.4,94.405 ; C10.2@132.4,97.885 cw(c132.426,97.885) C10.2@132.426,97.91 C11.2@132.426,94.43
  Bottom Layer w0.508: CN3.6@65.126,82.874 CN3.6@66.221,82.874 70.968,82.874 71.476,83.382 v1@71.476,87.097 ; C14.2@123.317,76.911 130.937,76.911 133.147,74.701 134.518,74.701 ; v1(130.2,86.176) 130.411,85.965 139.054,85.965 139.167,85.852 ; v1(132.708,90.874) 132.755,90.921 138.714,90.921 139.167,90.468 139.167,85.852 ; v1(133.858,80.569) 134.391,80.569 ; 134.696,64.516 134.518,64.694 134.518,74.701 ; v1(136.525,74.701) 134.518,74.701 ; v1@136.652,74.574 139.167,77.089 139.167,81.483 ; 138.095,80.569 138.252,80.569 139.167,81.483 ; 139.167,81.483 139.167,85.852
  Bottom Layer w0.762: v1(62.179,55.524) 62.179,56.693 ; CN3.6@65.126,82.874 62.173,82.874 61.671,82.372 61.671,77.165 62.382,76.454 65.303,76.454 ; U1.1@68.097,100.635 68.097,101.381 69.46,102.743 82.906,102.743 83.337,102.311 U1.7@83.337,100.635 U1.8@85.877,100.635 U1.9@88.417,100.635 U1.10@90.957,100.635 ; 71.628,60.071 CN4.1@71.628,59.258 71.628,57.963 70.358,56.693 62.179,56.693 ; v1(75.057,86.97) 75.108,87.02 CN3.11@77.089,87.02 80.035,87.02 80.997,86.059 C20.2@80.997,85.403 ; v1(81.153,74.651) 81.153,75.819 80.518,76.454 65.303,76.454 ; v1(87.528,53.873) 93.421,53.873 94.336,54.788 94.336,56.49 95.098,57.252 102.286,57.252 102.921,57.887 102.921,59.157 ; C36.2@90.73,81.509 90.73,82.477 C15.2@90.753,82.499 89.637,82.499 89.332,82.194 89.332,78.929 90.079,78.181 92.913,78.181 93.447,78.715 v2(93.447,79.578) 97.231,79.578 98.273,80.62 98.273,82.347 ; v1(94.005,69.621) 94.005,71.272 94.945,72.212 100.762,72.212 ; C27.2@95.301,83.92 95.174,83.793 v2(95.174,82.906) 97.714,82.906 98.273,82.347 ; U3.3@97.181,63.297 97.181,63.374 98.12,64.313 99.822,64.313 ; C41.2@99.798,62.992 99.798,64.289 99.822,64.313 ; v1(100.787,71.018) 100.787,72.187 100.762,72.212 ; v1(105.41,74.068) 105.41,72.771 104.851,72.212 C26.2@102.795,72.212 100.762,72.212 ; v1(106.477,102.311) 105.867,102.921 91.745,102.921 90.957,102.133 U1.10@90.957,100.635 ; B1.2@111.658,61.443 111.658,60.325 112.952,59.031 ; C29.2@117.221,59.031 112.952,59.031 ; v1(122.504,52.934) 122.504,47.422 124.46,45.466 v1(126.949,45.466) 127.042,45.373 U8.3@127.042,39.32 127.042,29.254 U8.3@127.076,29.22 130.876,33.02 133.883,33.02 ; D3.1@125.44,43.688 126.915,43.688 ; v1(133.629,40.31) 133.883,40.056 133.883,33.02 ; J1.2@136.931,33.02 133.883,33.02 ; 62.179,56.693 62.179,65.71 64.732,68.263 64.732,75.883 65.303,76.454 ; U1.10@90.957,100.635 90.957,99.746 91.897,98.806 93.142,98.806 94.107,97.841 94.107,94.469 92.956,93.318 v1(91.566,93.318) 90.804,93.318 89.941,92.456 v2(89.941,88.163) 96.444,88.163 98.273,86.335 98.273,82.347 ; 99.822,64.313 102.54,64.313 102.921,63.932 102.921,59.157 ; 102.921,59.157 103.046,59.031 112.952,59.031
  Bottom Layer w1.016: CN4.1@71.628,59.258 86.335,59.258 87.528,58.064 v1(87.528,53.873) ; 71.628,60.071 CN5.1@71.628,65.227 ; v1(77.572,63.322) 77.597,63.297 U13.3@86.386,63.297 88.343,63.297 C46.2@88.978,62.662 ; v1(109.525,98.933) 112.497,98.933 v1(112.573,99.009) ; v1(126.568,50.063) 126.656,50.151 U9.1@128.6,50.151 130.263,50.151 131.013,50.902 131.013,56.094 131.632,56.713 134.087,56.713 135.611,58.237 135.611,64.491 135.636,64.516 ; CN2.1@133.426,64.516 134.696,64.516 135.636,64.516 ; 134.391,80.569 138.095,80.569 ; CN6.1@137.185,64.618 137.084,64.516 135.636,64.516
  Bottom Layer w1.27: U11.3@68.612,40.175 69.956,41.519 71.272,41.519 ; U7.3@98.483,40.912 101.034,40.912 ; v1(124.714,103.759) 129.997,103.759 132.385,101.371 v1(132.385,96.317)
  other v1: 133.528,74.549